# EAGLE board FitnessTracker (EAGLE 9.6.2)
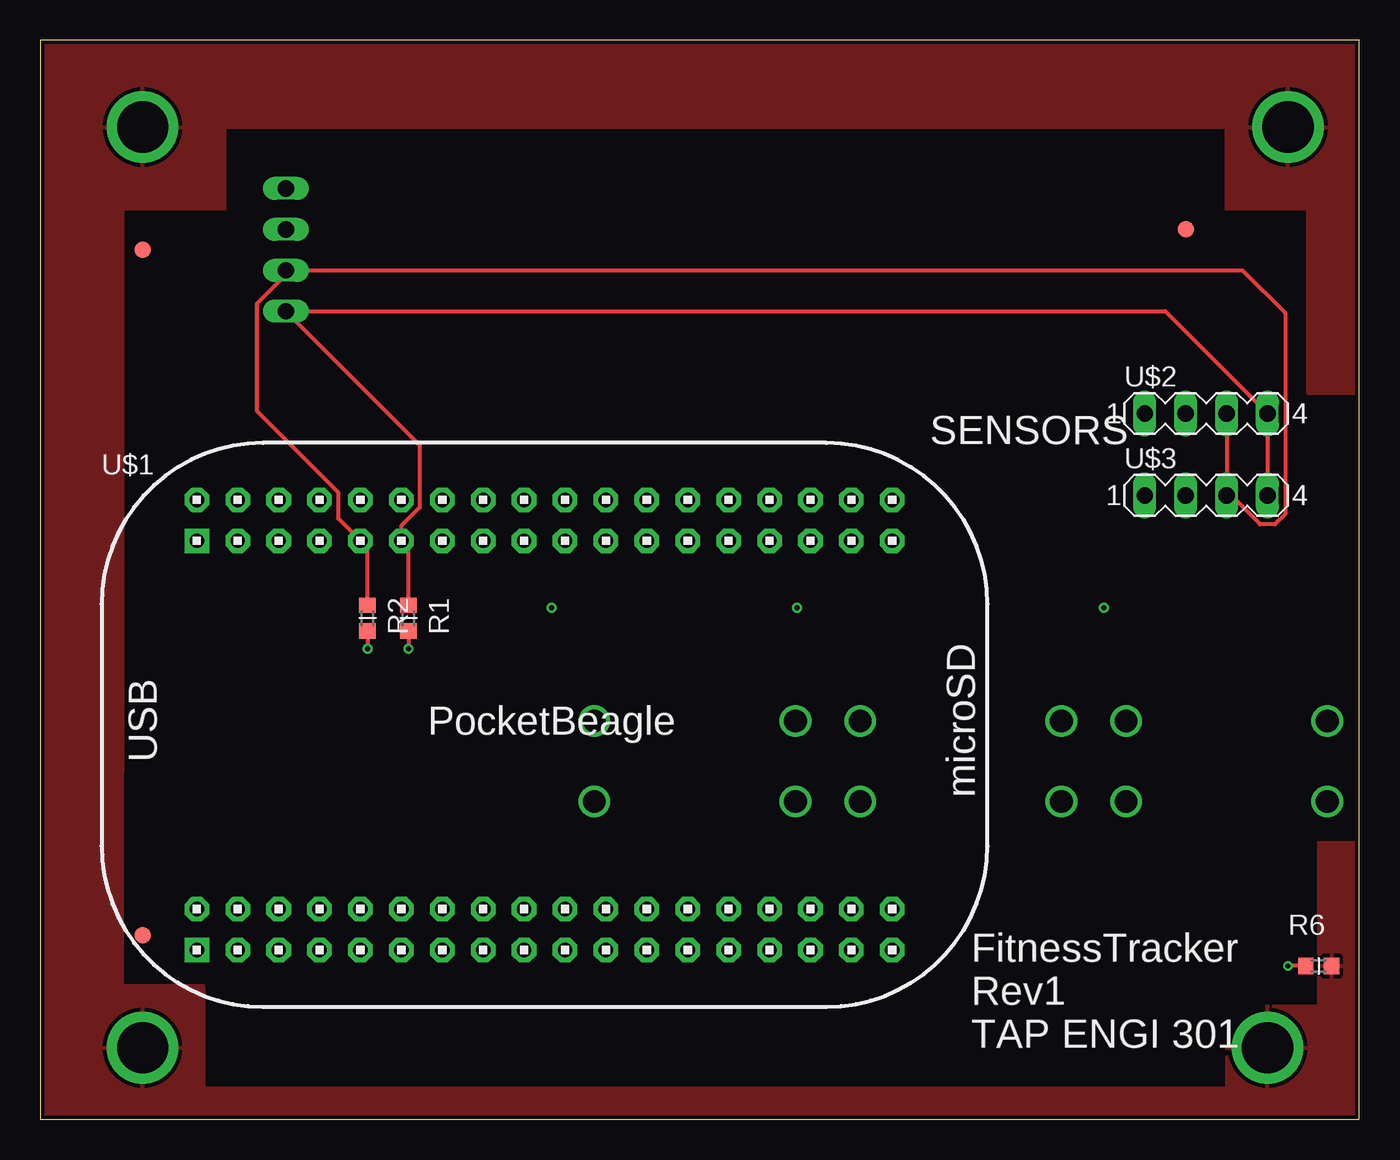
[diagram p0: board, top side]
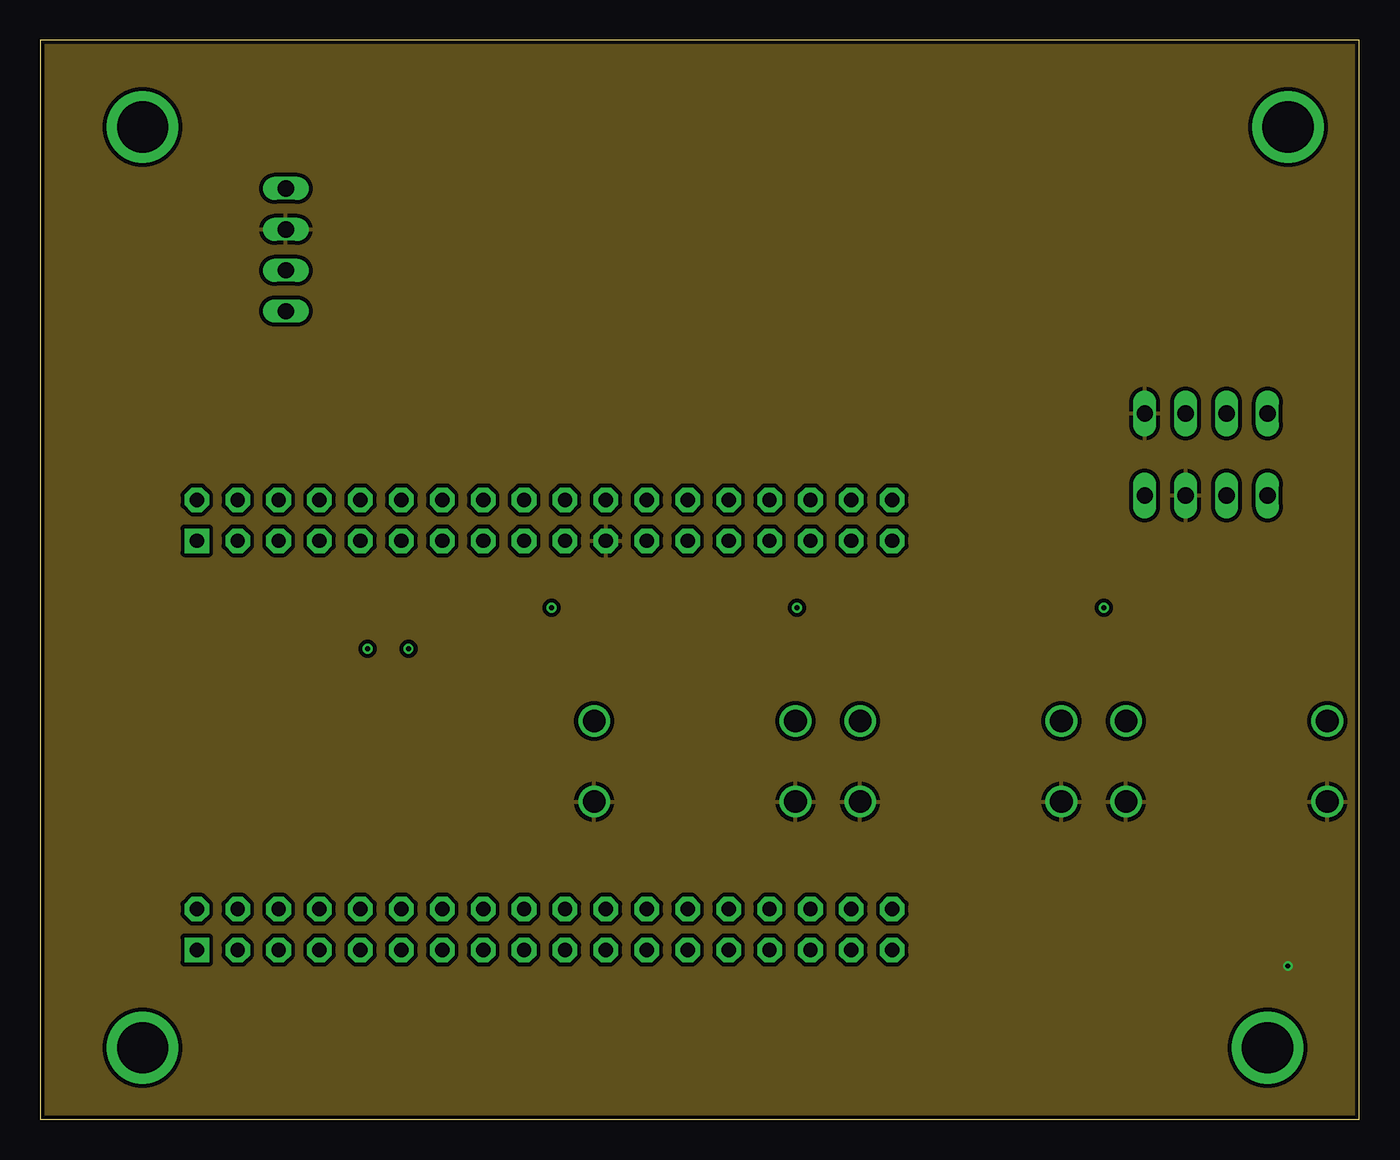
[diagram p1: board, inner layer Route2]
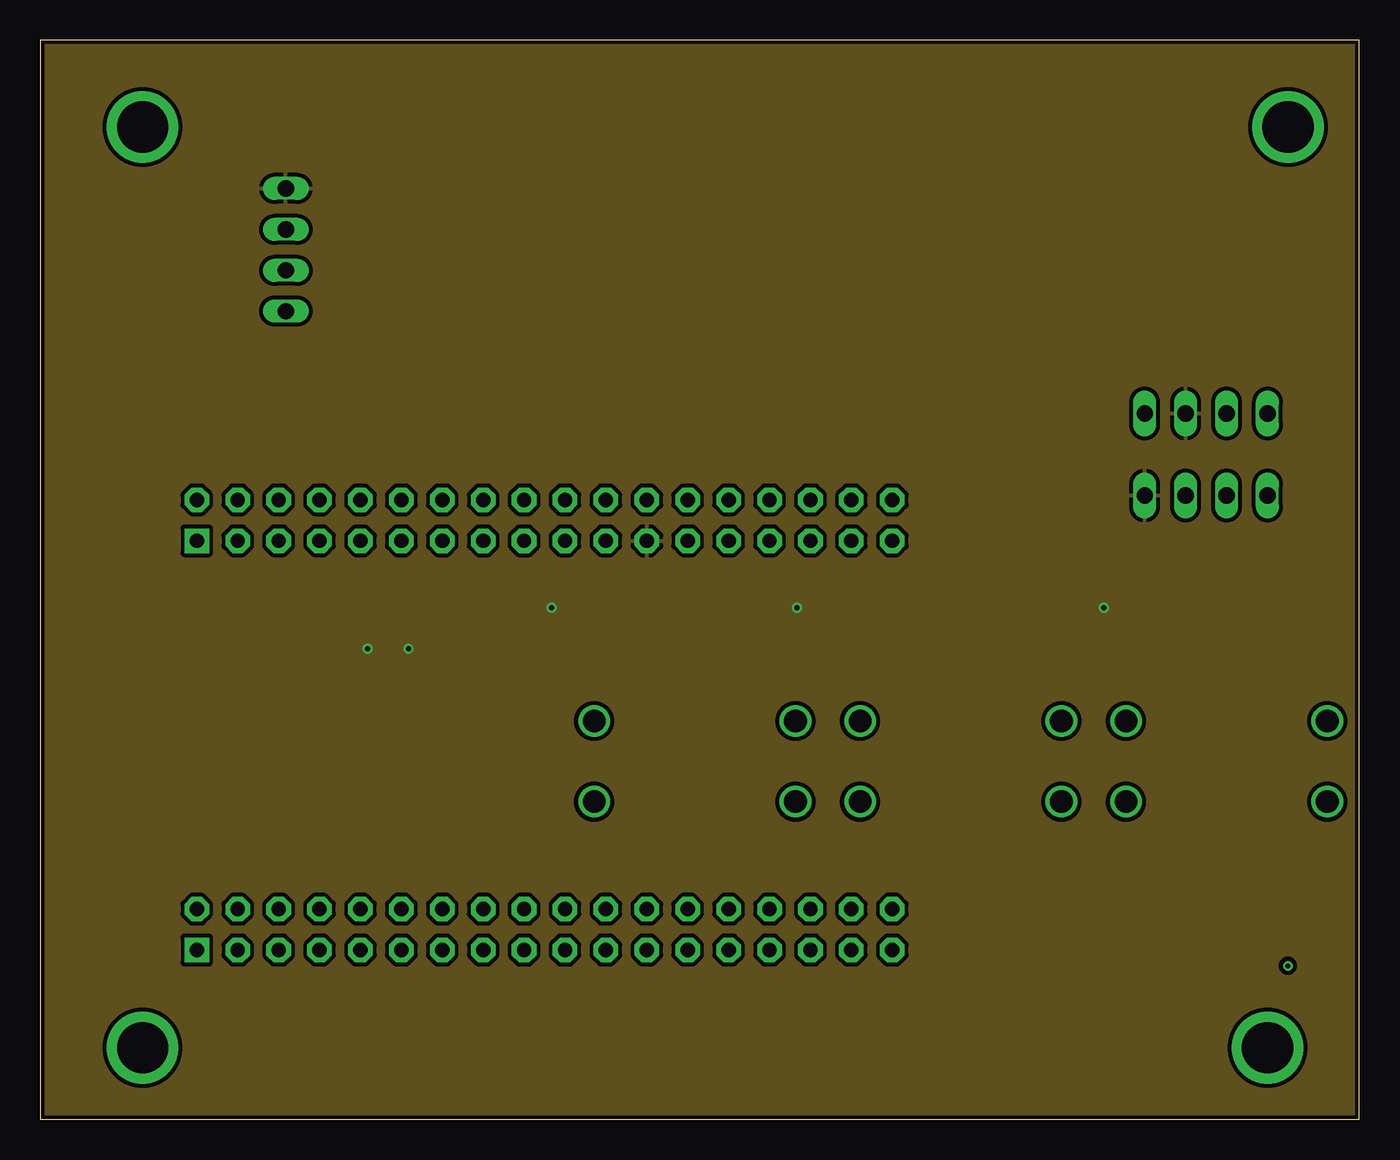
[diagram p2: board, inner layer Route15]
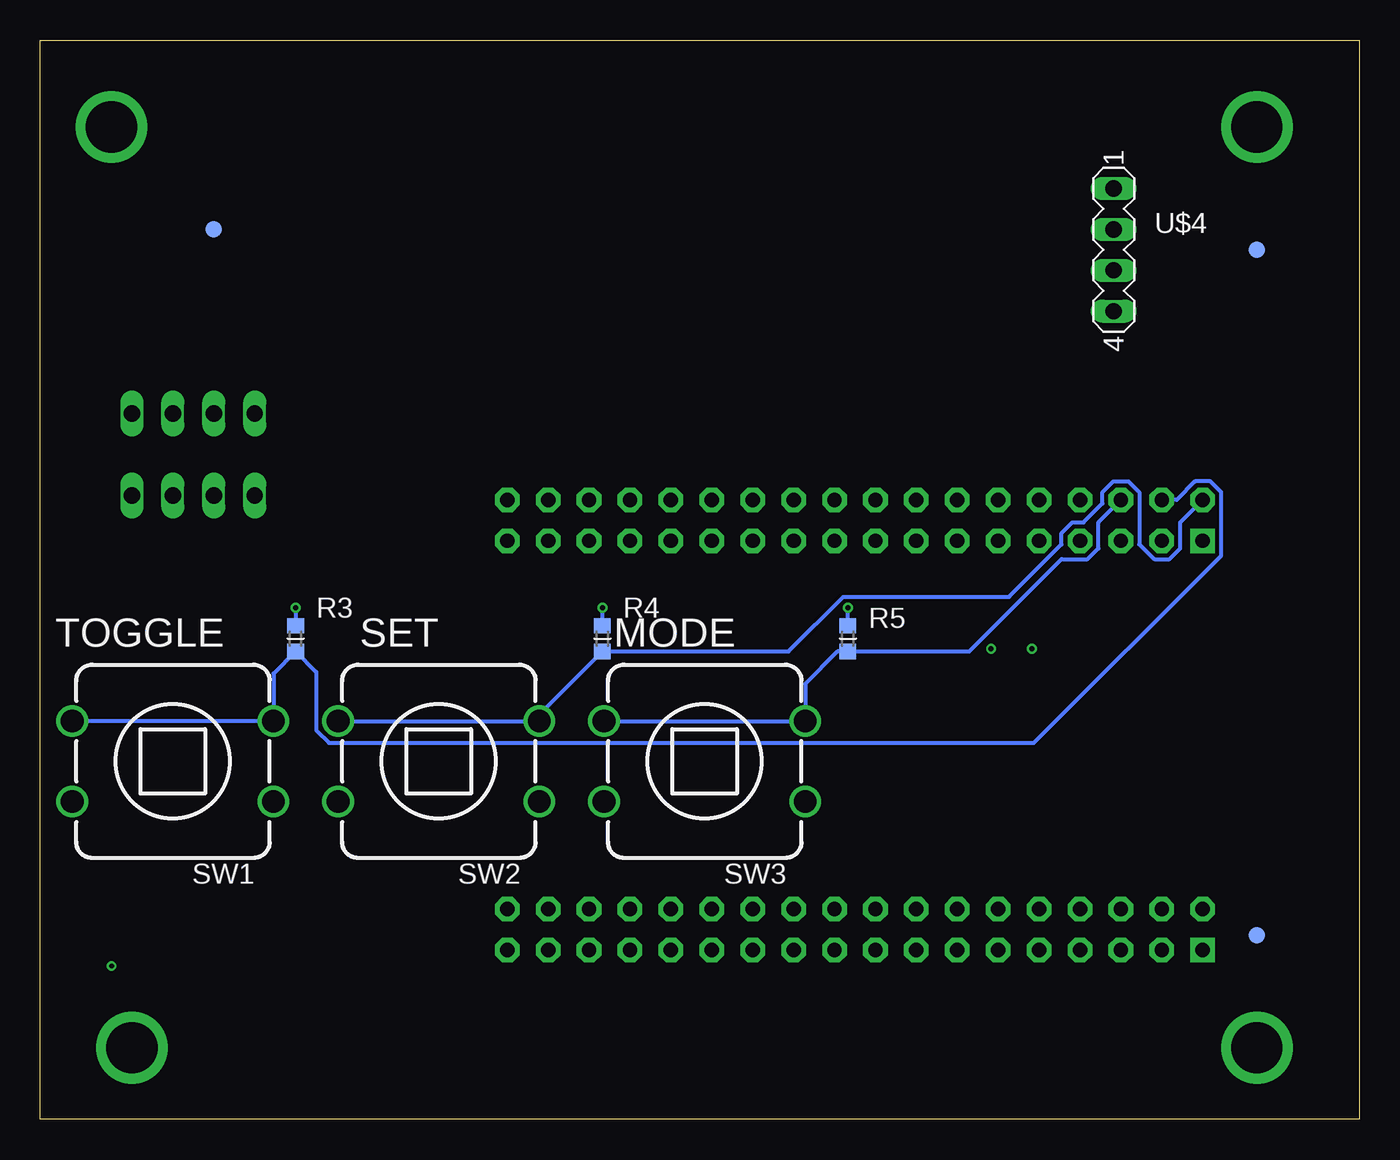
[diagram p3: board, bottom side, seen from below]

Size 81.89 x 66.98 mm. Coordinates in mm from the lower left corner, seen from the top.
Outline: 0,0 81.89,0 81.89,66.98 0,66.98 0,0
Copper layers (1*2*15*16): Top 0.035mm / dielectric 0.23mm / Route2 0.035mm / dielectric 0.93mm / Route15 0.035mm / dielectric 0.23mm / Bottom 0.035mm
Design rules "ENGI301_4lyr": minimum track width 10mil, minimum drill 12mil, track to track 10mil, track to pad 10mil, pad to pad 10mil, via to via 10mil, smd to smd 10mil, copper to edge 10mil, drill to drill 12mil, minimum pad ring 6mil, minimum via ring 6mil, stop-mask expansion 3mil, vias tented up to drill 25mil, thermal gap 10mil

## Footprints (pad centres in the part's own frame; a part is rotated, then mirrored left to right if it is on the bottom)
FIDUCIAL_40MIL = smd 1.016 x 1.016: P$1 0,0
MOUNTING_HOLE = drill 3.175 pad 4.445: P$1 0,0
R0603 = smd 0.95 x 1.031: 1 -0.8,0; 2 0.8,0
BUTTON_12.5MM = drill 1.4: 1 -6.25,2.5; 2 -6.25,-2.5; 3 6.25,2.5; 4 6.25,-2.5
POCKETBEAGLE = drill 0.889 pad 1.524 square: 1@P1 5.91,3.53; 1@P2 5.91,28.93 | drill 0.889 pad 1.524 octagon: 2@P1 5.91,6.07; 2@P2 5.91,31.47; 3@P1 8.45,3.53; 3@P2 8.45,28.93; 4@P1 8.45,6.07; 4@P2 8.45,31.47; 5@P1 10.99,3.53; 5@P2 10.99,28.93; 6@P1 10.99,6.07; 6@P2 10.99,31.47; 7@P1 13.53,3.53; 7@P2 13.53,28.93; 8@P1 13.53,6.07; 8@P2 13.53,31.47; 9@P1 16.07,3.53; 9@P2 16.07,28.93; 10@P1 16.07,6.07; 10@P2 16.07,31.47; 11@P1 18.61,3.53; 11@P2 18.61,28.93; 12@P1 18.61,6.07; 12@P2 18.61,31.47; 13@P1 21.15,3.53; 13@P2 21.15,28.93; 14@P1 21.15,6.07; 14@P2 21.15,31.47; 15@P1 23.69,3.53; 15@P2 23.69,28.93; 16@P1 23.69,6.07; 16@P2 23.69,31.47; 17@P1 26.23,3.53; 17@P2 26.23,28.93; 18@P1 26.23,6.07; 18@P2 26.23,31.47; 19@P1 28.77,3.53; 19@P2 28.77,28.93; 20@P1 28.77,6.07; 20@P2 28.77,31.47; 21@P1 31.31,3.53; 21@P2 31.31,28.93; 22@P1 31.31,6.07; 22@P2 31.31,31.47; 23@P1 33.85,3.53; 23@P2 33.85,28.93; 24@P1 33.85,6.07; 24@P2 33.85,31.47; 25@P1 36.39,3.53; 25@P2 36.39,28.93; 26@P1 36.39,6.07; 26@P2 36.39,31.47; 27@P1 38.93,3.53; 27@P2 38.93,28.93; 28@P1 38.93,6.07; 28@P2 38.93,31.47; 29@P1 41.47,3.53; 29@P2 41.47,28.93; 30@P1 41.47,6.07; 30@P2 41.47,31.47; 31@P1 44.01,3.53; 31@P2 44.01,28.93; 32@P1 44.01,6.07; 32@P2 44.01,31.47; 33@P1 46.55,3.53; 33@P2 46.55,28.93; 34@P1 46.55,6.07; 34@P2 46.55,31.47; 35@P1 49.09,3.53; 35@P2 49.09,28.93; 36@P1 49.09,6.07; 36@P2 49.09,31.47
MA04-1 = drill 1.016 long: 1 -3.81,0; 2 -1.27,0; 3 1.27,0; 4 3.81,0

## Placement (x,y rotation side)
FUD1  FIDUCIAL  [FIDUCIAL_40MIL]  6.35,53.98 0 top
FUD2  FIDUCIAL  [FIDUCIAL_40MIL]  6.35,11.43 0 top
FUD3  FIDUCIAL  [FIDUCIAL_40MIL]  71.12,55.24 0 top
FUD4  FIDUCIAL  [FIDUCIAL_40MIL]  6.35,53.98 0 bottom
FUD5  FIDUCIAL  [FIDUCIAL_40MIL]  6.35,11.43 0 bottom
FUD6  FIDUCIAL  [FIDUCIAL_40MIL]  71.12,55.24 0 bottom
MGT1  MOUNTING_HOLE  [MOUNTING_HOLE]  76.2,4.45 0 top
MGT2  MOUNTING_HOLE  [MOUNTING_HOLE]  6.35,4.45 0 top
MGT3  MOUNTING_HOLE  [MOUNTING_HOLE]  77.47,61.59 0 top
MGT4  MOUNTING_HOLE  [MOUNTING_HOLE]  6.35,61.59 0 top
R1  1K  [R0603]  22.86,31.11 270 top
R2  1K  [R0603]  20.32,31.11 270 top
R3  1K  [R0603]  66.04,29.84 90 bottom
R4  1K  [R0603]  46.99,29.84 90 bottom
R5  1K  [R0603]  31.75,29.84 90 bottom
R6  1M  [R0603]  79.38,9.53 0 top
SW1  PUSH_BUTTON  [BUTTON_12.5MM]  73.66,22.23 180 bottom
SW2  PUSH_BUTTON  [BUTTON_12.5MM]  57.15,22.23 180 bottom
SW3  PUSH_BUTTON  [BUTTON_12.5MM]  40.64,22.23 180 bottom
U$1  POCKETBEAGLE  [POCKETBEAGLE]  3.81,6.99 0 top
U$2  SSD1306  [MA04-1]  72.39,43.81 0 top
U$3  MPU6050  [MA04-1]  72.39,38.73 0 top
U$4  AHT10  [MA04-1]  15.24,53.98 270 bottom

## Library data of the parts
FUD1-FUD6 MGT1-MGT4 = MISC
R1-R6 SW1-SW3 U$1-U$4 = 301-lib

## Nets
CGND: MGT1.P$1 MGT2.P$1 MGT3.P$1 MGT4.P$1 R6.2
GND: R6.1 SW1.1 SW1.3 SW2.1 SW2.3 SW3.1 SW3.3 U$1.21@P2 U$2.1 U$3.2 U$4.2
I2C_SCL: R2.1 U$1.9@P2 U$2.3 U$3.3 U$4.3
I2C_SDA: R1.1 U$1.11@P2 U$2.4 U$3.4 U$4.4
MODE_BUTTON: R5.1 SW3.2 SW3.4 U$1.6@P2
SET_BUTTON: R4.1 SW2.2 SW2.4 U$1.2@P2
TOGGLE_BUTTON: R3.1 SW1.2 SW1.4 U$1.4@P2
VDD_3P3V: R1.2 R2.2 R3.2 R4.2 R5.2 U$1.23@P2 U$2.2 U$3.1 U$4.1

## Tracks (layer width: path | path; a pad name or v marks a point on that pad's centre or on a via)
CGND
  pour Top: 0,22.23 0,-1.27 84.45,-1.27 84.45,17.14 79.38,17.14 79.38,6.99 73.66,6.99 73.66,1.91 10.16,1.91 10.16,8.26 5.08,8.26 5.08,22.23
  pour Top: 0,21.59 -0.64,68.58 0,68.58 84.45,68.58 84.45,45.09 78.74,45.09 78.74,56.52 73.66,56.52 73.66,61.59 11.43,61.59 11.43,56.52 5.08,56.52 5.08,21.59
GND  (via drill 0.3 pad 0.61)
  Top 0.254: R6.1 v77.47,9.53
  pour Route2: -3.81,77.47 -3.81,-2.54 86.36,-2.54 86.36,77.47
I2C_SCL
  Top 0.254: U$2.3 U$3.3 73.94,38.73 75.75,36.93 76.65,36.93 77.29,37.57 77.29,50.06 74.65,52.7 U$4.3 15.24,52.42 13.44,50.62 13.44,43.98 18.48,38.93 18.48,37.31 U$1.9@P2 20.32,35.48 R2.1
I2C_SDA
  Top 0.254: U$3.4 U$2.4 69.85,50.16 U$4.4 23.56,41.84 23.56,37.98 22.42,36.84 U$1.11@P2 22.86,35.48 R1.1
MODE_BUTTON
  Bottom 0.254: U$1.6@P2 16.2,37.06 16.2,35.44 16.87,34.77 18.48,34.77 24.21,29.05 R5.1 32.38,29.05 34.39,27.04 SW3.2 SW3.4
SET_BUTTON
  Bottom 0.254: 50.9,24.77 50.9,25.14 R4.1 35.42,29.05 32.03,32.44 21.74,32.44 18.48,35.7 18.48,36.39 17.81,37.06 17.12,37.06 15.94,38.24 15.94,38.93 15.27,39.6 14.33,39.6 13.66,38.93 13.66,35.7 12.73,34.77 11.79,34.77 11.12,35.44 11.12,37.06 U$1.2@P2 | 50.9,24.77 SW2.2 | SW2.4 50.94,24.73 50.9,24.77
TOGGLE_BUTTON
  Bottom 0.254: SW1.4 SW1.2 67.41,27.68 R3.1 64.76,27.77 64.76,24.16 63.96,23.36 20.21,23.36 8.58,34.99 8.58,38.93 9.25,39.6 10.19,39.6 11.34,38.45 U$1.4@P2
VDD_3P3V  (via drill 0.3 pad 0.61)
  Top 0.254: R2.2 v20.32,29.21 | R1.2 v22.86,29.21
  Bottom 0.254: R5.2 v31.75,31.75 | R4.2 v46.99,31.75 | v66.04,31.75 R3.2
  pour Route15: -5.08,76.2 -5.08,-7.62 88.9,-7.62 88.9,81.28 -5.08,81.28

## Text on the board
tPlace: SENSORS | FitnessTracker / Rev1 / TAP ENGI 301
bPlace: MODE | SET | TOGGLE